# EAGLE board hw2_pcb (EAGLE 8.1.0)
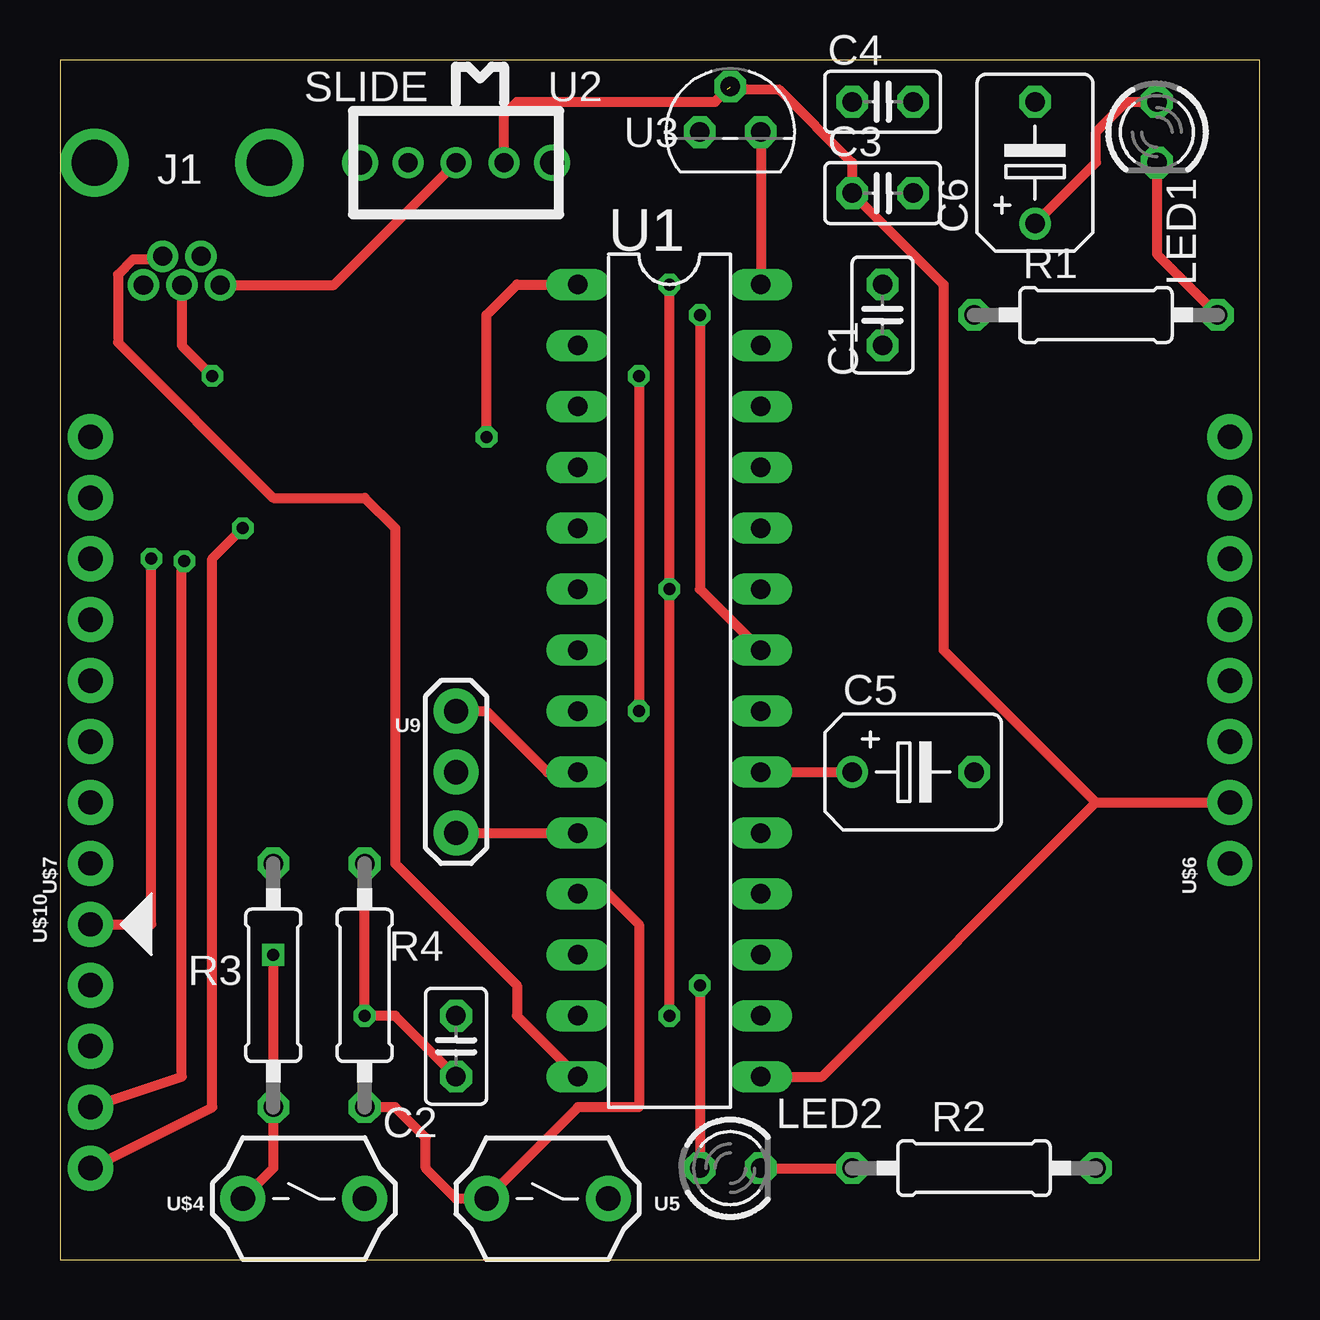
[diagram p0: board, top side]
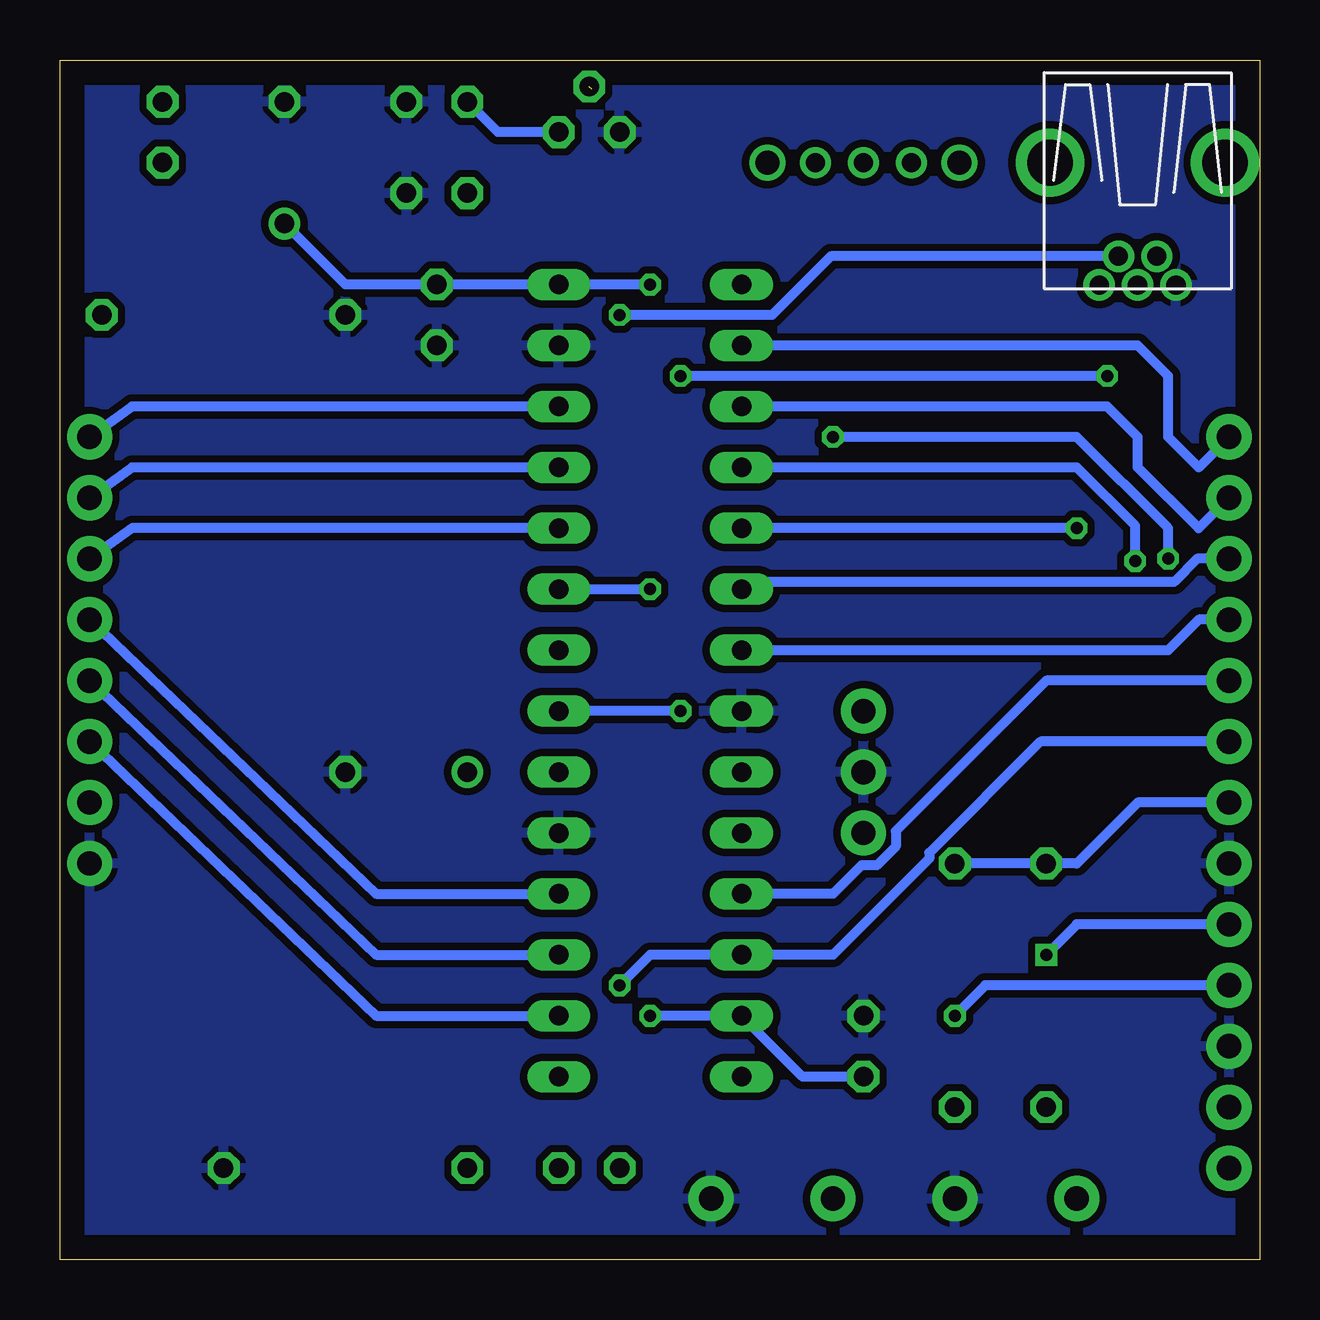
[diagram p1: board, bottom side, seen from below]

Size 50 x 50 mm. Coordinates in mm from the lower left corner, seen from the top.
Outline: 0,0 50,0 50,50 0,50 0,0
Copper layers (1*16): Top 0.035mm / dielectric 1.5mm / Bottom 0.035mm
Design rules "default": minimum track width 10mil, minimum drill 24mil, track to track 8mil, track to pad 8mil, pad to pad 8mil, via to via 8mil, smd to smd 8mil, copper to edge 40mil, drill to drill 8mil, minimum pad ring 10mil, minimum via ring 8mil, stop-mask expansion 4mil, vias tented up to drill 0mil, thermal gap 10mil

## Footprints (pad centres in the part's own frame; a part is rotated, then mirrored left to right if it is on the bottom)
C025-025X050 = drill 0.813 octagon: 1 -1.27,0; 2 1.27,0
B45181B = drill 0.813: + -2.54,0 | drill 0.813 octagon: - 2.54,0
USB-MB-H = drill 0.8: D+ 5.1,0; D- 3.9,0.8; GND 5.1,-1.6; ID 3.9,-0.8; VBUS 5.1,1.6 | drill 1.9: P$6 0,-3.65; P$7 0,3.65
LED3MM = drill 0.813 octagon: A -1.27,0; K 1.27,0
0207/10 = drill 0.813 octagon: 1 -5.08,0; 2 5.08,0
DIL28-3 = drill 0.813 long: 1 -16.51,-3.81; 2 -13.97,-3.81; 3 -11.43,-3.81; 4 -8.89,-3.81; 5 -6.35,-3.81; 6 -3.81,-3.81; 7 -1.27,-3.81; 8 1.27,-3.81; 9 3.81,-3.81; 10 6.35,-3.81; 11 8.89,-3.81; 12 11.43,-3.81; 13 13.97,-3.81; 14 16.51,-3.81; 15 16.51,3.81; 16 13.97,3.81; 17 11.43,3.81; 18 8.89,3.81; 19 6.35,3.81; 20 3.81,3.81; 21 1.27,3.81; 22 -1.27,3.81; 23 -3.81,3.81; 24 -6.35,3.81; 25 -8.89,3.81; 26 -11.43,3.81; 27 -13.97,3.81; 28 -16.51,3.81
SLIDE = drill 0.8: 1 -2,0; 2 0,0; 3 2,0 | drill 1: P$1 -4,0; P$2 4,0
TO92 = drill 0.813 octagon: 1 -1.27,0; 2 0,1.905; 3 1.27,0
PB = drill 1.016 pad 1.88: 1 -2.54,0; 2 2.54,0
OSC = drill 1.016 pad 1.88: 1 -2.54,0; 2 0,0; 3 2.54,0
1X08 = drill 1.016 pad 1.88: 1 0,0; 2 2.54,0; 3 5.08,0; 4 7.62,0; 5 10.16,0; 6 12.7,0; 7 15.24,0; 8 17.78,0
1X05 = drill 1.016 pad 1.88: 1 0,0; 2 2.54,0; 3 5.08,0; 4 7.62,0; 5 10.16,0

## Placement (x,y rotation side)
C1  0.1uF  [C025-025X050]  34.29,39.37 270 top
C2  0.1uF  [C025-025X050]  16.51,8.89 90 top
C3  0.1uF  [C025-025X050]  34.29,44.45 0 top
C4  0.1uF  [C025-025X050]  34.29,48.26 0 top
C5  10uF  [B45181B]  35.56,20.32 0 top
C6  10uF  [B45181B]  40.64,45.72 90 top
J1  USB-MB-H  [USB-MB-H]  5.08,45.72 270 top
LED1  Red  [LED3MM]  45.72,46.99 270 top
LED2  Green  [LED3MM]  27.94,3.81 0 top
R1  330  [0207/10]  43.18,39.37 0 top
R2  330  [0207/10]  38.1,3.81 180 top
R3  10k  [0207/10]  8.89,11.43 90 top
R4  10k  [0207/10]  12.7,11.43 90 top
U1  PIC32MX250F128B  [DIL28-3]  25.4,24.13 270 top
U2  SLIDE  [SLIDE]  16.51,45.72 0 top
U3  MCP1702  [TO92]  27.94,46.99 0 top
U5  USER  [PB]  20.32,2.54 0 top
U9  8MHz  [OSC]  16.51,20.32 270 top
U$4  RESET  [PB]  10.16,2.54 0 top
U$6  CONN_08  [1X08]  48.77,16.51 90 top
U$7  CONN_08  [1X08]  1.27,16.51 90 top
U$10  PICKIT3  [1X05]  1.27,13.97 270 top

## Library data of the parts
C1-C6 J1 LED1 LED2 R1-R4 U1-U3 U5 U9 U$4 U$6 U$7 U$10 = hw2_pcb

## Nets
+3V3: C1.1 C2.1 C4.1 C6.+ LED1.A R3.2 R4.2 U1.13 U1.23 U1.28 U3.3 U$7.2 U$10.2
+5V: C3.1 U1.15 U2.3 U3.2 U$6.2
A0: U1.2 U$7.8
A1: U1.3 U$7.7
A4/LED: LED2.A U1.12 U$7.3
B2: U1.6 U$7.6
B3: U1.7 U$7.5
B4/USER: R4.1 U1.11 U5.1 U$7.4
B7: U1.16 U$6.3
B8: U1.17 U$6.4
B9: U1.18 U$6.5
B13: U1.24 U$6.6
B14: U1.25 U$6.7
B15: U1.26 U$6.8
D+: J1.D+ U1.21
D-: J1.D- U1.22
GND: C1.2 C2.2 C3.2 C4.2 C5.- C6.- J1.GND R1.1 R2.1 U1.8 U1.19 U1.27 U3.1 U5.2 U9.2 U$4.2 U$6.1 U$7.1 U$10.3
MCLR: R3.1 U1.1 U$4.1 U$10.1
N$1: J1.VBUS U2.2
N$2: LED2.K R2.2
N$4: LED1.K R1.2
N$5: U1.9 U9.1
N$6: U1.10 U9.3
N$8: C5.+ U1.20
PGC: U1.5 U$10.5
PGD: U1.4 U$10.4
USBID: J1.ID U1.14

## Tracks (layer width: path | path; a pad name or v marks a point on that pad's centre or on a via)
+3V3  (via drill 0.5)
  Top 0.406: v25.4,10.16 v25.4,27.94 v25.4,40.64 | C6.+ 43.18,45.72 43.18,46.99 44.45,48.26 LED1.A | C2.1 13.97,10.16 v12.7,10.16 R4.2 | U3.3 U1.28
  Bottom 0.406: R4.2 R3.2 7.62,16.51 5.08,19.05 U$7.2 | v25.4,10.16 U1.13 19.05,7.62 C2.1 | v25.4,40.64 U1.28 C1.1 38.1,40.64 C6.+ | U3.3 31.75,46.99 C4.1 | U1.23 v25.4,27.94 | U$10.2 11.43,11.43 v12.7,10.16
+5V  (1 unrouted)
  Top 0.406: U2.3 18.51,47.72 19.05,48.26 27.3,48.26 27.83,48.78 29.96,48.78 33.02,45.72 C3.1 36.83,40.64 36.83,25.4 43.18,19.05 | 43.18,19.05 U$6.2 | U1.15 31.75,7.62 43.18,19.05
A0
  Bottom 0.406: U$7.8 2.54,33.02 3.81,34.29 3.81,36.83 5.08,38.1 U1.2
A1
  Bottom 0.406: U$7.7 2.54,30.48 5.08,33.02 5.08,34.29 6.35,35.56 U1.3
A4/LED  (via drill 0.5)
  Top 0.406: v26.67,11.43 LED2.A
  Bottom 0.406: v26.67,11.43 25.4,12.7 U1.12 17.78,12.7 13.77,16.71 13.77,16.95 9.13,21.59 U$7.3
B2
  Bottom 0.406: U$7.6 2.59,29.21 3.56,28.25 21.29,28.25 U1.6
B3
  Bottom 0.406: U$7.5 2.54,26.67 3.81,25.4 U1.7
B4/USER
  Top 0.406: U1.11 22.86,15.24 24.13,13.97 24.13,6.35 21.59,6.35 U5.1 16.51,2.54 15.24,3.81 15.24,5.08 13.97,6.35 R4.1
  Bottom 0.406: U1.11 17.78,15.24 16.59,16.43 15.95,16.43 15.16,17.22 15.16,17.86 8.89,24.13 U$7.4
B7
  Bottom 0.406: U$6.3 36.83,10.16 U1.16
B8
  Bottom 0.406: U$6.4 36.83,12.7 U1.17
B9
  Bottom 0.406: U$6.5 36.83,15.24 U1.18
B13
  Bottom 0.406: U$6.6 46.99,30.48 U1.24
B14
  Bottom 0.406: U$6.7 46.99,33.02 U1.25
B15
  Bottom 0.406: U$6.8 46.99,35.56 U1.26
D+  (via drill 0.5)
  Top 0.406: J1.D+ 5.08,38.1 v6.35,36.83 | v24.13,36.83 v24.13,22.86
  Bottom 0.406: v6.35,36.83 v24.13,36.83 | v24.13,22.86 U1.21
D-  (via drill 0.5)
  Top 0.406: U1.22 26.67,27.94 v26.67,39.37
  Bottom 0.406: J1.D- 17.87,41.82 20.32,39.37 v26.67,39.37
GND
  pour Bottom (isolate 0.305): 0,49.53 0,0 49.53,0 49.53,49.53
MCLR  (via drill 0.5)
  Top 0.406: U$10.1 3.81,13.97 v3.81,29.21 | v17.78,34.29 17.78,39.37 19.05,40.64 U1.1 | U$4.1 8.89,3.81 R3.1 v8.89,12.7
  Bottom 0.406: v3.81,29.21 3.81,30.48 7.62,34.29 v17.78,34.29 | U$10.1 7.62,13.97 v8.89,12.7
N$1
  Top 0.406: J1.VBUS 11.41,40.62 U2.2
N$2
  Top 0.406: LED2.K R2.2
N$4
  Top 0.406: LED1.K 45.72,41.91 R1.2
N$5
  Top 0.406: U9.1 17.78,22.86 20.32,20.32 U1.9
N$6
  Top 0.406: U9.3 U1.10
N$8
  Top 0.406: U1.20 C5.+
PGC  (via drill 0.5)
  Top 0.406: U$10.5 6.35,6.35 6.35,29.21 v7.62,30.48
  Bottom 0.406: v7.62,30.48 U1.5
PGD  (via drill 0.5)
  Top 0.406: U$10.4 5.08,7.62 5.08,29.21 v5.19,29.1
  Bottom 0.406: v5.19,29.1 5.19,30.59 7.62,33.02 U1.4
USBID
  Top 0.406: J1.ID 4.14,41.68 3.04,41.68 2.42,41.06 2.42,38.22 8.89,31.75 12.7,31.75 13.97,30.48 13.97,16.51 19.05,11.43 19.05,10.16 U1.14